# EAGLE board All_Board (EAGLE 9.5.1)
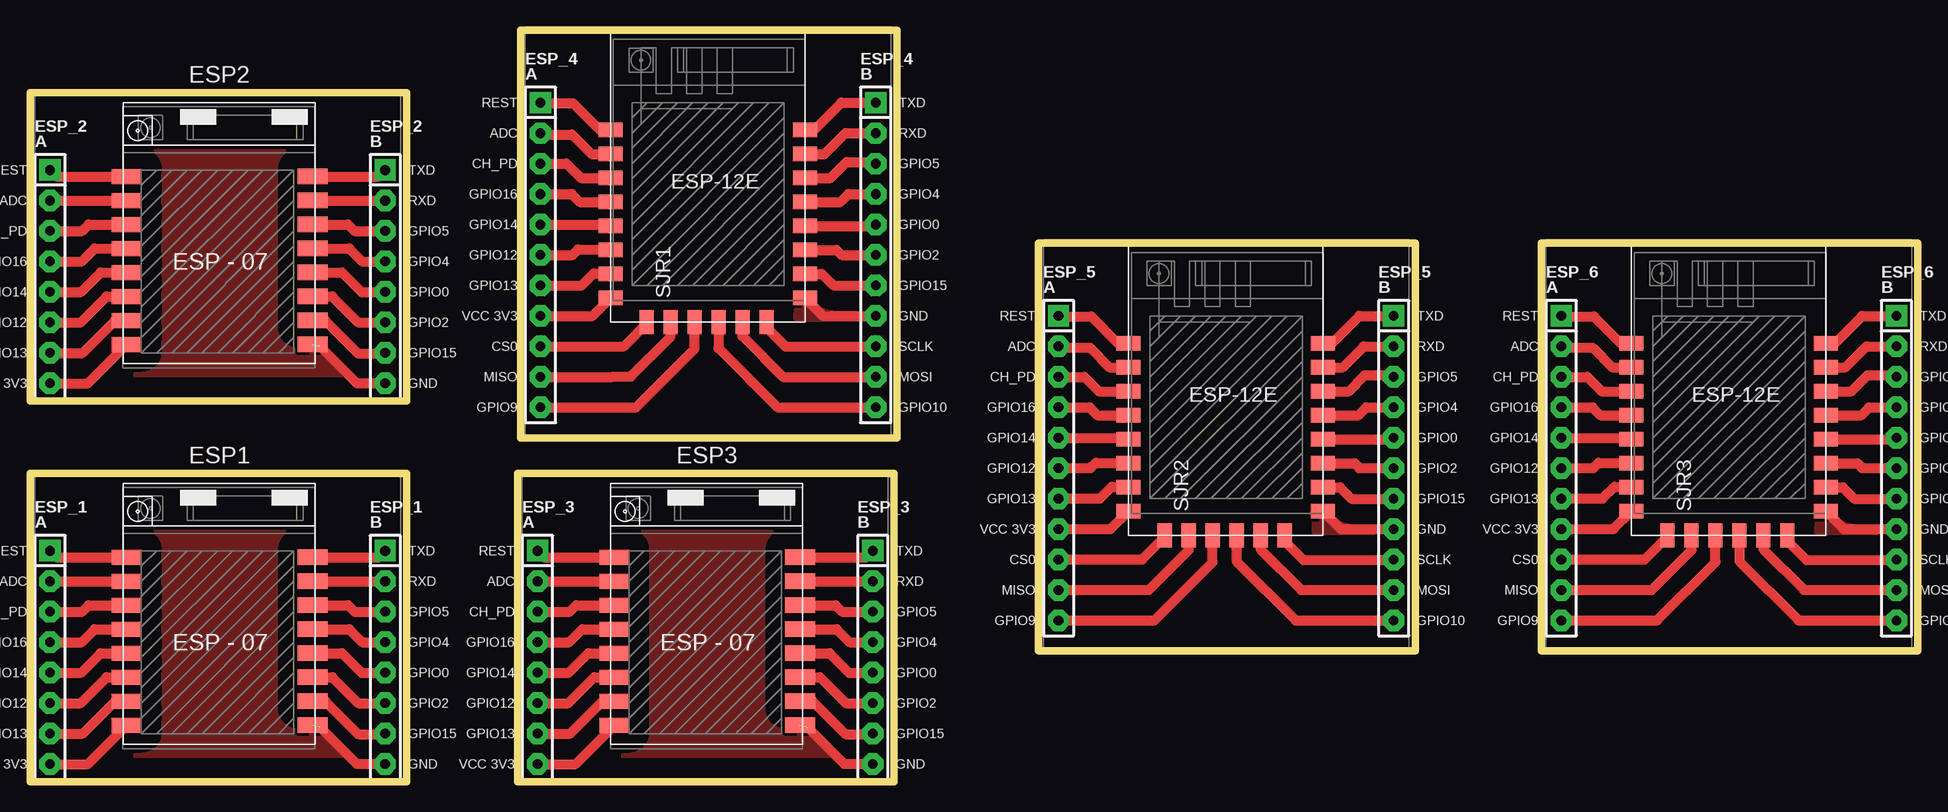
[diagram p0: board, top side]

Size 157.37 x 62.68 mm. Coordinates in mm from the lower left corner, seen from the top.
Outline: 0,25.5 0,25.3 0,0 31.4,0 31.4,25.7 0,25.7 0,25.5
Outline: 0,57.25 0,57.05 0,31.75 31.4,31.75 31.4,57.45 0,57.45 0,57.25
Outline: 40.64,25.5 40.64,25.3 40.64,0 72.04,0 72.04,25.7 40.64,25.7 40.64,25.5
Outline: 40.88,28.68 72.28,28.68 72.28,62.68 40.88,62.68 40.88,28.68
Outline: 84.06,10.9 115.46,10.9 115.46,44.9 84.06,44.9 84.06,10.9
Outline: 125.97,10.9 157.37,10.9 157.37,44.9 125.97,44.9 125.97,10.9
Copper layers (1*16): Top 0.035mm / dielectric 1.5mm / Bottom 0.035mm
Design rules "default": minimum track width 6mil, minimum drill 0.35mm, track to track 6mil, track to pad 6mil, pad to pad 6mil, via to via 6mil, smd to smd 6mil, copper to edge 40mil, drill to drill 6mil, minimum pad ring 10mil, minimum via ring 8mil, stop-mask expansion 4mil, vias tented up to drill 0mil, thermal gap 10mil

## Footprints (pad centres in the part's own frame; a part is rotated, then mirrored left to right if it is on the bottom)
ESP-07-SMT = smd 2.5 x 1.27: ADC -7.696,5.209; EN -7.696,3.209; GND 7.801,-6.791; GPIO0 7.801,-0.791; GPIO2 7.801,-2.791; GPIO4 7.801,1.209; GPIO5 7.801,3.209; GPIO12 -7.696,-2.791; GPIO13 -7.696,-4.791; GPIO14 -7.696,-0.791; GPIO15 7.801,-4.791; GPIO16 -7.696,1.209; RST -7.696,7.209; RX 7.801,5.209; TX 7.801,7.209; VCC -7.696,-6.791
ESP8266-ADAPTER = drill 0.813 pad 1.778 square: 1 -13.97,8.89; 9 13.97,8.89 | drill 0.813 pad 1.778 octagon: 2 -13.97,6.35; 3 -13.97,3.81; 4 -13.97,1.27; 5 -13.97,-1.27; 6 -13.97,-3.81; 7 -13.97,-6.35; 8 -13.97,-8.89; 10 13.97,6.35; 11 13.97,3.81; 12 13.97,1.27; 13 13.97,-1.27; 14 13.97,-3.81; 15 13.97,-6.35; 16 13.97,-8.89
ESP8266-12-ADAPTER = drill 0.813 pad 1.778 square: 1 -13.97,8.89; 9 13.97,8.89 | drill 0.813 pad 1.778 octagon: 2 -13.97,6.35; 3 -13.97,3.81; 4 -13.97,1.27; 5 -13.97,-1.27; 6 -13.97,-3.81; 7 -13.97,-6.35; 8 -13.97,-8.89; 10 13.97,6.35; 11 13.97,3.81; 12 13.97,1.27; 13 13.97,-1.27; 14 13.97,-3.81; 15 13.97,-6.35; 16 13.97,-8.89; 17 -13.97,-11.43; 18 -13.97,-13.97; 19 -13.97,-16.51; 20 13.97,-11.43; 21 13.97,-13.97; 22 13.97,-16.51
ESP8266-ESP12E = smd 2 x 1.2: 1 -7.62,5.84; 2 -7.62,3.84; 3 -7.62,1.84; 4 -7.62,-0.16; 5 -7.62,-2.16; 6 -7.62,-4.16; 7 -7.62,-6.16; 8 -7.62,-8.16; 9 8.58,-8.16; 10 8.58,-6.16; 11 8.58,-4.16; 12 8.58,-2.16; 13 8.58,-0.16; 14 8.58,1.84; 15 8.58,3.84; 16 8.58,5.84 | smd 1.2 x 2: 17 -4.62,-10.16; 18 -2.62,-10.16; 19 -0.62,-10.16; 20 1.38,-10.16; 21 3.38,-10.16; 22 5.38,-10.16

## Placement (x,y rotation side)
ESP1  ESP8266-07SMT  [ESP-07-SMT]  15.77,11.5 0 top
ESP2  ESP8266-07SMT  [ESP-07-SMT]  15.77,43.25 0 top
ESP3  ESP8266-07SMT  [ESP-07-SMT]  56.41,11.5 0 top
ESP_1  ESP8266-WITH-ADAPTER  [ESP8266-ADAPTER]  15.64,10.36 0 top
ESP_2  ESP8266-WITH-ADAPTER  [ESP8266-ADAPTER]  15.64,42.11 0 top
ESP_3  ESP8266-WITH-ADAPTER  [ESP8266-ADAPTER]  56.28,10.36 0 top
ESP_4  ESP8266-12-WITH-ADAPTER  [ESP8266-12-ADAPTER]  56.52,47.73 0 top
ESP_5  ESP8266-12-WITH-ADAPTER  [ESP8266-12-ADAPTER]  99.7,29.95 0 top
ESP_6  ESP8266-12-WITH-ADAPTER  [ESP8266-12-ADAPTER]  141.61,29.95 0 top
SJR1  [ESP8266-ESP12E]  56.01,48.49 0 top
SJR2  [ESP8266-ESP12E]  99.19,30.71 0 top
SJR3  [ESP8266-ESP12E]  141.1,30.71 0 top

## Library data of the parts
ESP1-ESP3 = esp8266-07
ESP_1-ESP_6 = esp8266_with_adapter
SJR1-SJR3 = esp12e

## Nets
ADC: ESP1.ADC ESP_1.2
ADC1: ESP2.ADC ESP_2.2
ADC2: ESP3.ADC ESP_3.2
ADC3: ESP_4.2 SJR1.2
ADC4: ESP_5.2 SJR2.2
ADC5: ESP_6.2 SJR3.2
CH_PD: ESP1.EN ESP_1.3
CH_PD1: ESP2.EN ESP_2.3
CH_PD2: ESP3.EN ESP_3.3
CH_PD3: ESP_4.3 SJR1.3
CH_PD4: ESP_5.3 SJR2.3
CH_PD5: ESP_6.3 SJR3.3
CS0: ESP_4.17 SJR1.17
CS1: ESP_5.17 SJR2.17
CS2: ESP_6.17 SJR3.17
GND: ESP1.GND ESP_1.16
GND1: ESP2.GND ESP_2.16
GND2: ESP3.GND ESP_3.16
GND3: ESP_4.16 SJR1.9
GND4: ESP_5.16 SJR2.9
GND5: ESP_6.16 SJR3.9
GPIO0: ESP1.GPIO0 ESP_1.13
GPIO1: ESP2.GPIO16 ESP_2.4
GPIO2: ESP1.GPIO2 ESP_1.14
GPIO3: ESP2.GPIO14 ESP_2.5
GPIO4: ESP1.GPIO4 ESP_1.12
GPIO5: ESP1.GPIO5 ESP_1.11
GPIO6: ESP2.GPIO12 ESP_2.6
GPIO7: ESP2.GPIO13 ESP_2.7
GPIO8: ESP2.GPIO5 ESP_2.11
GPIO9: ESP2.GPIO4 ESP_2.12
GPIO10: ESP2.GPIO0 ESP_2.13
GPIO11: ESP2.GPIO2 ESP_2.14
GPIO12: ESP1.GPIO12 ESP_1.6
GPIO13: ESP1.GPIO13 ESP_1.7
GPIO14: ESP1.GPIO14 ESP_1.5
GPIO15: ESP1.GPIO15 ESP_1.15
GPIO16: ESP1.GPIO16 ESP_1.4
GPIO17: ESP2.GPIO15 ESP_2.15
GPIO18: ESP3.GPIO16 ESP_3.4
GPIO19: ESP3.GPIO14 ESP_3.5
GPIO20: ESP3.GPIO12 ESP_3.6
GPIO21: ESP3.GPIO13 ESP_3.7
GPIO22: ESP3.GPIO5 ESP_3.11
GPIO23: ESP3.GPIO4 ESP_3.12
GPIO24: ESP3.GPIO0 ESP_3.13
GPIO25: ESP3.GPIO2 ESP_3.14
GPIO26: ESP3.GPIO15 ESP_3.15
GPIO27: ESP_4.14 SJR1.11
GPIO28: ESP_4.11 SJR1.14
GPIO29: ESP_4.12 SJR1.13
GPIO30: ESP_4.13 SJR1.12
GPIO31: ESP_4.15 SJR1.10
GPIO32: ESP_4.22 SJR1.20
GPIO33: ESP_4.19 SJR1.19
GPIO34: ESP_4.4 SJR1.4
GPIO35: ESP_4.5 SJR1.5
GPIO36: ESP_4.7 SJR1.7
GPIO37: ESP_4.6 SJR1.6
GPIO38: ESP_5.14 SJR2.11
GPIO39: ESP_5.11 SJR2.14
GPIO40: ESP_5.12 SJR2.13
GPIO41: ESP_5.13 SJR2.12
GPIO42: ESP_5.15 SJR2.10
GPIO43: ESP_5.22 SJR2.20
GPIO44: ESP_5.19 SJR2.19
GPIO45: ESP_5.4 SJR2.4
GPIO46: ESP_5.5 SJR2.5
GPIO47: ESP_5.7 SJR2.7
GPIO48: ESP_5.6 SJR2.6
GPIO49: ESP_6.14 SJR3.11
GPIO50: ESP_6.11 SJR3.14
GPIO51: ESP_6.12 SJR3.13
GPIO52: ESP_6.13 SJR3.12
GPIO53: ESP_6.15 SJR3.10
GPIO54: ESP_6.22 SJR3.20
GPIO55: ESP_6.19 SJR3.19
GPIO56: ESP_6.4 SJR3.4
GPIO57: ESP_6.5 SJR3.5
GPIO58: ESP_6.7 SJR3.7
GPIO59: ESP_6.6 SJR3.6
MISO: ESP_4.18 SJR1.18
MISO1: ESP_5.18 SJR2.18
MISO2: ESP_6.18 SJR3.18
MOSI: ESP_4.21 SJR1.21
MOSI1: ESP_5.21 SJR2.21
MOSI2: ESP_6.21 SJR3.21
RESET: ESP1.RST ESP_1.1
RESET1: ESP2.RST ESP_2.1
RESET2: ESP3.RST ESP_3.1
RESET3: ESP_4.1 SJR1.1
RESET4: ESP_5.1 SJR2.1
RESET5: ESP_6.1 SJR3.1
RXD: ESP1.RX ESP_1.10
RXD1: ESP2.RX ESP_2.10
RXD2: ESP3.RX ESP_3.10
RXD3: ESP_4.10 SJR1.15
RXD4: ESP_5.10 SJR2.15
RXD5: ESP_6.10 SJR3.15
SCLK: ESP_4.20 SJR1.22
SCLK1: ESP_5.20 SJR2.22
SCLK2: ESP_6.20 SJR3.22
TXD: ESP1.TX ESP_1.9
TXD1: ESP2.TX ESP_2.9
TXD2: ESP3.TX ESP_3.9
TXD3: ESP_4.9 SJR1.16
TXD4: ESP_5.9 SJR2.16
TXD5: ESP_6.9 SJR3.16
VCC: ESP1.VCC ESP_1.8
VCC1: ESP2.VCC ESP_2.8
VCC2: ESP3.VCC ESP_3.8
VCC3: ESP_4.8 SJR1.8
VCC4: ESP_5.8 SJR2.8
VCC5: ESP_6.8 SJR3.8

## Tracks (layer width: path | path; a pad name or v marks a point on that pad's centre or on a via)
ADC
  Top 0.813: ESP_1.2 ESP1.ADC
ADC1
  Top 0.813: ESP_2.2 ESP2.ADC
ADC2
  Top 0.813: ESP_3.2 ESP3.ADC
ADC3
  Top 0.813: ESP_4.2 42.66,53.97 45.18,53.97 46.82,52.33 SJR1.2
ADC4
  Top 0.813: ESP_5.2 85.84,36.19 88.36,36.19 90,34.55 SJR2.2
ADC5
  Top 0.813: ESP_6.2 127.75,36.19 130.27,36.19 131.91,34.55 SJR3.2
CH_PD
  Top 0.813: ESP_1.3 4.35,14.17 4.89,14.71 ESP1.EN
CH_PD1
  Top 0.813: ESP_2.3 4.35,45.92 4.89,46.46 ESP2.EN
CH_PD2
  Top 0.813: ESP_3.3 44.99,14.17 45.53,14.71 ESP3.EN
CH_PD3
  Top 0.813: ESP_4.3 44.71,51.54 45.92,50.33 SJR1.3
CH_PD4
  Top 0.813: ESP_5.3 87.89,33.76 89.1,32.55 SJR2.3
CH_PD5
  Top 0.813: ESP_6.3 129.8,33.76 131.01,32.55 SJR3.3
CS0
  Top 0.813: ESP_4.17 49.51,36.3 51.39,38.18 SJR1.17
CS1
  Top 0.813: ESP_5.17 92.69,18.52 94.57,20.4 SJR2.17
CS2
  Top 0.813: ESP_6.17 134.6,18.52 136.48,20.4 SJR3.17
GND  (1 unrouted)
  Top 0.813: ESP_1.16 27.25,1.47 24.15,4.57
  pour Top (isolate 1.676): 0.35,20.77 30.75,20.77 30.95,20.57 30.95,0.27 0.45,0.27 0.45,20.67
GND1  (1 unrouted)
  Top 0.813: ESP_2.16 27.25,33.22 24.15,36.32
  pour Top (isolate 1.676): 0.35,52.52 30.75,52.52 30.95,52.32 30.95,32.02 0.45,32.02 0.45,52.42
GND2  (1 unrouted)
  Top 0.813: ESP_3.16 67.89,1.47 64.79,4.57
  pour Top (isolate 1.676): 40.99,20.77 71.39,20.77 71.59,20.57 71.59,0.27 41.09,0.27 41.09,20.67
GND3
  Top 0.813: SJR1.9 66.08,38.84 ESP_4.16
  pour Top (isolate 1.676): 41.28,62.97 41.28,28.77 71.68,28.67 71.78,28.77 71.78,62.97
GND4
  Top 0.813: SJR2.9 109.26,21.06 ESP_5.16
  pour Top (isolate 1.676): 84.46,45.19 84.46,10.99 114.86,10.89 114.96,10.99 114.96,45.19
GND5
  Top 0.813: SJR3.9 151.17,21.06 ESP_6.16
  pour Top (isolate 1.676): 126.37,45.19 126.37,10.99 156.77,10.89 156.87,10.99 156.87,45.19
GPIO0
  Top 0.813: ESP1.GPIO0 26.01,10.71 27.65,9.07 29.59,9.07 ESP_1.13
GPIO1
  Top 0.813: ESP_2.4 4.31,43.38 5.39,44.46 ESP2.GPIO16
GPIO2
  Top 0.813: ESP1.GPIO2 25.21,8.71 27.37,6.55 ESP_1.14
GPIO3
  Top 0.813: ESP_2.5 4.27,40.84 5.89,42.46 ESP2.GPIO14
GPIO4
  Top 0.813: ESP1.GPIO4 26.61,12.71 27.69,11.63 ESP_1.12
GPIO5
  Top 0.813: ESP1.GPIO5 26.51,14.71 27.05,14.17 ESP_1.11
GPIO6
  Top 0.813: ESP_2.6 4.23,38.3 6.39,40.46 ESP2.GPIO12
GPIO7
  Top 0.813: ESP_2.7 4.39,35.76 7.09,38.46 ESP2.GPIO13
GPIO8
  Top 0.813: ESP2.GPIO5 26.51,46.46 27.05,45.92 ESP_2.11
GPIO9
  Top 0.813: ESP2.GPIO4 26.61,44.46 27.69,43.38 ESP_2.12
GPIO10
  Top 0.813: ESP2.GPIO0 26.01,42.46 27.65,40.82 29.59,40.82 ESP_2.13
GPIO11
  Top 0.813: ESP2.GPIO2 25.21,40.46 27.37,38.3 ESP_2.14
GPIO12
  Top 0.813: ESP_1.6 4.23,6.55 6.39,8.71 ESP1.GPIO12
GPIO13
  Top 0.813: ESP_1.7 4.39,4.01 7.09,6.71 ESP1.GPIO13
GPIO14
  Top 0.813: ESP_1.5 4.27,9.09 5.89,10.71 ESP1.GPIO14
GPIO15
  Top 0.813: ESP1.GPIO15 24.61,6.71 27.35,3.97 29.57,3.97 ESP_1.15
GPIO16
  Top 0.813: ESP_1.4 4.31,11.63 5.39,12.71 ESP1.GPIO16
GPIO17
  Top 0.813: ESP2.GPIO15 24.61,38.46 27.35,35.72 29.57,35.72 ESP_2.15
GPIO18
  Top 0.813: ESP_3.4 44.95,11.63 46.03,12.71 ESP3.GPIO16
GPIO19
  Top 0.813: ESP_3.5 44.91,9.09 46.53,10.71 ESP3.GPIO14
GPIO20
  Top 0.813: ESP_3.6 44.87,6.55 47.03,8.71 ESP3.GPIO12
GPIO21
  Top 0.813: ESP_3.7 45.03,4.01 47.73,6.71 ESP3.GPIO13
GPIO22
  Top 0.813: ESP3.GPIO5 67.15,14.71 67.69,14.17 ESP_3.11
GPIO23
  Top 0.813: ESP3.GPIO4 67.25,12.71 68.33,11.63 ESP_3.12
GPIO24
  Top 0.813: ESP3.GPIO0 66.65,10.71 68.29,9.07 70.23,9.07 ESP_3.13
GPIO25
  Top 0.813: ESP3.GPIO2 65.85,8.71 68.01,6.55 ESP_3.14
GPIO26
  Top 0.813: ESP3.GPIO15 65.25,6.71 67.99,3.97 70.21,3.97 ESP_3.15
GPIO27
  Top 0.813: ESP_4.14 67.63,43.92 67.22,44.33 SJR1.11
GPIO28
  Top 0.813: SJR1.14 66.74,50.33 68.08,51.67 70.36,51.67 ESP_4.11
GPIO29
  Top 0.813: SJR1.13 67.54,48.33 68.21,49 ESP_4.12
GPIO30
  Top 0.813: SJR1.12 70.36,46.33 ESP_4.13
GPIO31
  Top 0.813: SJR1.10 66.02,42.33 66.98,41.37 ESP_4.15
GPIO32
  Top 0.813: SJR1.20 57.39,36.16 62.33,31.22 ESP_4.22
GPIO33
  Top 0.813: ESP_4.19 50.53,31.22 55.39,36.08 SJR1.19
GPIO34
  Top 0.813: ESP_4.4 45.15,49 45.82,48.33 SJR1.4
GPIO35
  Top 0.813: ESP_4.5 48.26,46.46 SJR1.5
GPIO36
  Top 0.813: ESP_4.7 45.99,41.38 46.98,42.37 48.35,42.37 SJR1.7
GPIO37
  Top 0.813: ESP_4.6 45.23,43.92 45.68,44.37 48.35,44.37 SJR1.6
GPIO38
  Top 0.813: ESP_5.14 110.81,26.14 110.4,26.55 SJR2.11
GPIO39
  Top 0.813: SJR2.14 109.92,32.55 111.26,33.89 113.54,33.89 ESP_5.11
GPIO40
  Top 0.813: SJR2.13 110.72,30.55 111.39,31.22 ESP_5.12
GPIO41
  Top 0.813: SJR2.12 113.54,28.55 ESP_5.13
GPIO42
  Top 0.813: SJR2.10 109.2,24.55 110.16,23.59 ESP_5.15
GPIO43
  Top 0.813: SJR2.20 100.57,18.38 105.51,13.44 ESP_5.22
GPIO44
  Top 0.813: ESP_5.19 93.71,13.44 98.57,18.3 SJR2.19
GPIO45
  Top 0.813: ESP_5.4 88.33,31.22 89,30.55 SJR2.4
GPIO46
  Top 0.813: ESP_5.5 91.44,28.68 SJR2.5
GPIO47
  Top 0.813: ESP_5.7 89.17,23.6 90.16,24.59 91.53,24.59 SJR2.7
GPIO48
  Top 0.813: ESP_5.6 88.41,26.14 88.86,26.59 91.53,26.59 SJR2.6
GPIO49
  Top 0.813: ESP_6.14 152.72,26.14 152.31,26.55 SJR3.11
GPIO50
  Top 0.813: SJR3.14 151.83,32.55 153.17,33.89 155.45,33.89 ESP_6.11
GPIO51
  Top 0.813: SJR3.13 152.63,30.55 153.3,31.22 ESP_6.12
GPIO52
  Top 0.813: SJR3.12 155.45,28.55 ESP_6.13
GPIO53
  Top 0.813: SJR3.10 151.11,24.55 152.07,23.59 ESP_6.15
GPIO54
  Top 0.813: SJR3.20 142.48,18.38 147.42,13.44 ESP_6.22
GPIO55
  Top 0.813: ESP_6.19 135.62,13.44 140.48,18.3 SJR3.19
GPIO56
  Top 0.813: ESP_6.4 130.24,31.22 130.91,30.55 SJR3.4
GPIO57
  Top 0.813: ESP_6.5 133.35,28.68 SJR3.5
GPIO58
  Top 0.813: ESP_6.7 131.08,23.6 132.07,24.59 133.44,24.59 SJR3.7
GPIO59
  Top 0.813: ESP_6.6 130.32,26.14 130.77,26.59 133.44,26.59 SJR3.6
MISO
  Top 0.813: ESP_4.18 48.57,33.76 48.58,33.77 50.08,33.77 53.39,37.08 SJR1.18
MISO1
  Top 0.813: ESP_5.18 91.75,15.98 91.76,15.99 93.26,15.99 96.57,19.3 SJR2.18
MISO2
  Top 0.813: ESP_6.18 133.66,15.98 133.67,15.99 135.17,15.99 138.48,19.3 SJR3.18
MOSI
  Top 0.813: SJR1.21 59.39,37.16 62.79,33.76 ESP_4.21
MOSI1
  Top 0.813: SJR2.21 102.57,19.38 105.97,15.98 ESP_5.21
MOSI2
  Top 0.813: SJR3.21 144.48,19.38 147.88,15.98 ESP_6.21
RESET
  Top 0.813: ESP_1.1 2.21,18.71 ESP1.RST
RESET1
  Top 0.813: ESP_2.1 2.21,50.46 ESP2.RST
RESET2
  Top 0.813: ESP_3.1 42.85,18.71 ESP3.RST
RESET3
  Top 0.813: ESP_4.1 42.6,56.57 45.28,56.57 47.52,54.33 SJR1.1
RESET4
  Top 0.813: ESP_5.1 85.78,38.79 88.46,38.79 90.7,36.55 SJR2.1
RESET5
  Top 0.813: ESP_6.1 127.69,38.79 130.37,38.79 132.61,36.55 SJR3.1
RXD
  Top 0.813: ESP1.RX ESP_1.10
RXD1
  Top 0.813: ESP2.RX ESP_2.10
RXD2
  Top 0.813: ESP3.RX ESP_3.10
RXD3
  Top 0.813: SJR1.15 66.24,52.33 67.99,54.08 ESP_4.10
RXD4
  Top 0.813: SJR2.15 109.42,34.55 111.17,36.3 ESP_5.10
RXD5
  Top 0.813: SJR3.15 151.33,34.55 153.08,36.3 ESP_6.10
SCLK
  Top 0.813: SJR1.22 61.39,37.86 62.98,36.27 70.46,36.27 ESP_4.20
SCLK1
  Top 0.813: SJR2.22 104.57,20.08 106.16,18.49 113.64,18.49 ESP_5.20
SCLK2
  Top 0.813: SJR3.22 146.48,20.08 148.07,18.49 155.55,18.49 ESP_6.20
TXD
  Top 0.813: ESP1.TX 29.07,18.71 ESP_1.9
TXD1
  Top 0.813: ESP2.TX 29.07,50.46 ESP_2.9
TXD2
  Top 0.813: ESP3.TX 69.71,18.71 ESP_3.9
TXD3
  Top 0.813: SJR1.16 65.34,54.33 67.63,56.62 ESP_4.9
TXD4
  Top 0.813: SJR2.16 108.52,36.55 110.81,38.84 ESP_5.9
TXD5
  Top 0.813: SJR3.16 150.43,36.55 152.72,38.84 ESP_6.9
VCC
  Top 0.813: ESP_1.8 4.83,1.47 ESP1.VCC
VCC1
  Top 0.813: ESP_2.8 4.83,33.22 ESP2.VCC
VCC2
  Top 0.813: ESP_3.8 45.47,1.47 ESP3.VCC
VCC3
  Top 0.813: ESP_4.8 46.9,38.84 SJR1.8
VCC4
  Top 0.813: ESP_5.8 90.08,21.06 SJR2.8
VCC5
  Top 0.813: ESP_6.8 131.99,21.06 SJR3.8